# EAGLE board blinky board (EAGLE 9.5.2)
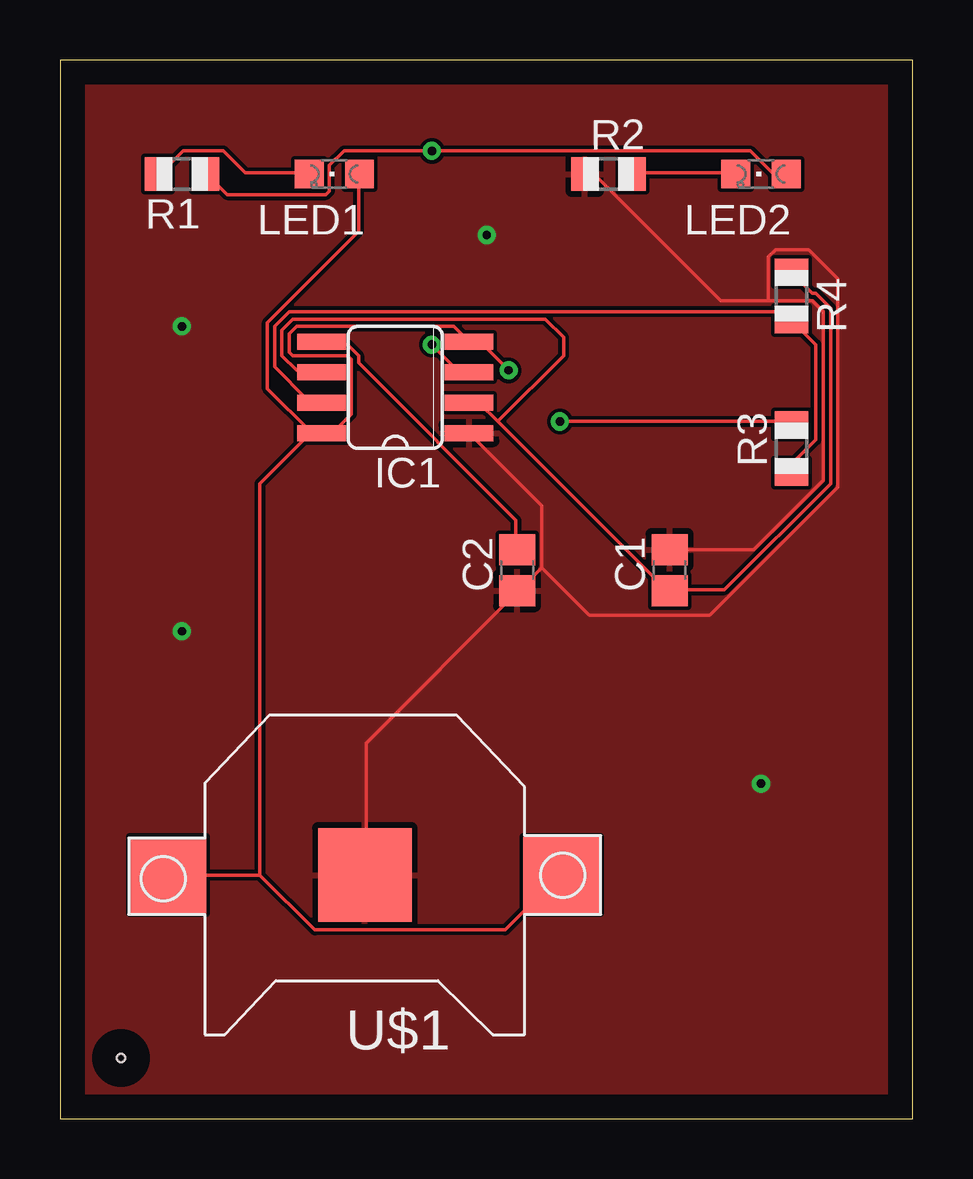
[diagram p0: board, top side]
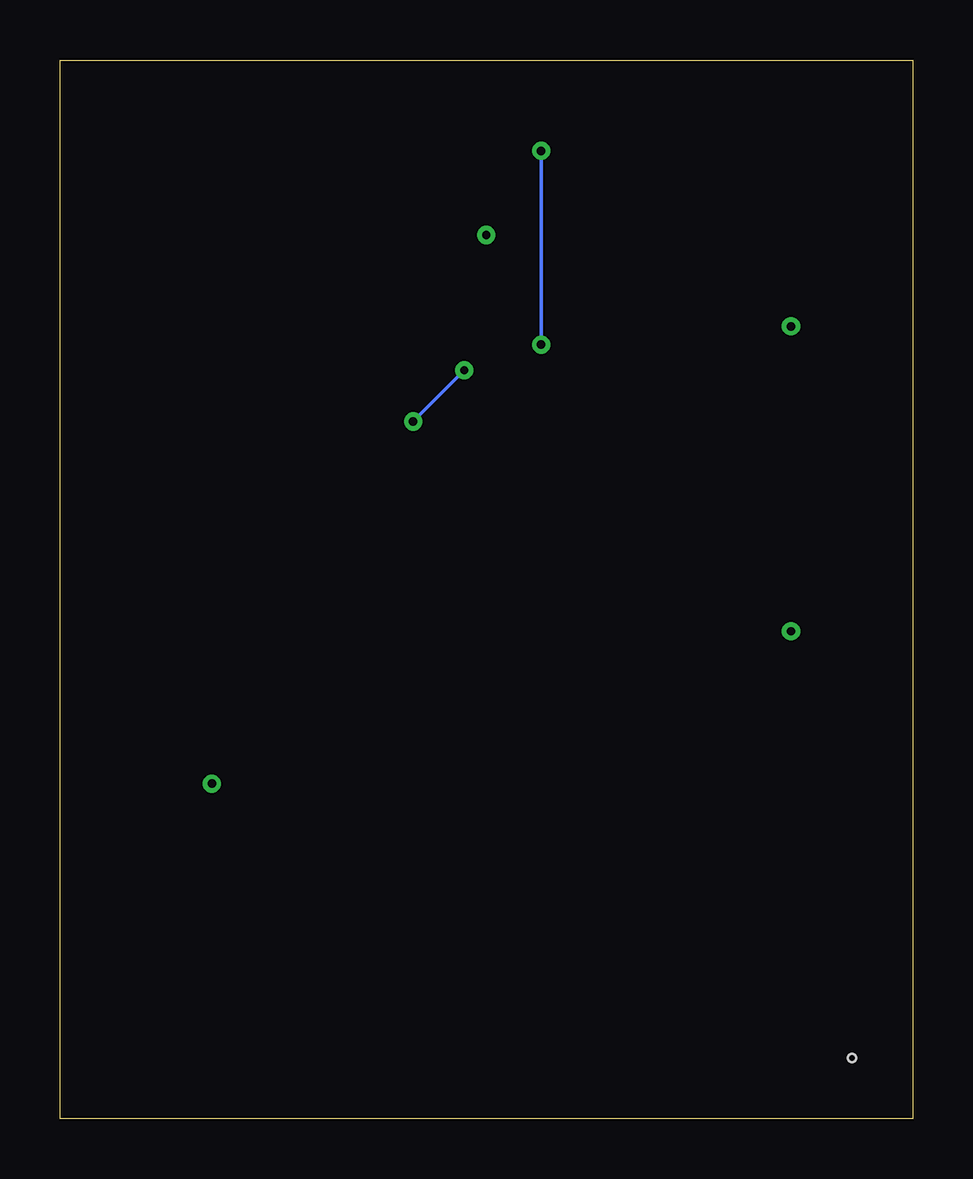
[diagram p1: board, bottom side, seen from below]

Size 35.54 x 44.12 mm. Coordinates in mm from the lower left corner, seen from the top.
Outline: 0,0 35.54,0 35.54,44.12 0,44.12 0,0
Copper layers (1*16): Top 0.035mm / dielectric 1.5mm / Bottom 0.035mm
Design rules "default": minimum track width 6mil, minimum drill 0.35mm, track to track 6mil, track to pad 6mil, pad to pad 6mil, via to via 6mil, smd to smd 6mil, copper to edge 40mil, drill to drill 6mil, minimum pad ring 10mil, minimum via ring 8mil, stop-mask expansion 4mil, vias tented up to drill 0mil, thermal gap 10mil
Holes 0.35 mm at 2.54,2.54

## Footprints (pad centres in the part's own frame; a part is rotated, then mirrored left to right if it is on the bottom)
C0805 = smd 1.3 x 1.5: 1 -0.85,0; 2 0.85,0
SO08 = smd 0.66 x 2.032: 1 -1.905,-3.073; 2 -0.635,-3.073; 3 0.635,-3.073; 4 1.905,-3.073; 5 1.905,3.073; 6 0.635,3.073; 7 -0.635,3.073; 8 -1.905,3.073
CHIPLED_0805 = smd 1.2 x 1.2: A 0,-1.05; C 0,1.05
R0805 = smd 1.1 x 1.4: 1 -1,0; 2 1,0
CR1220-SMD = smd 3.2 x 3.2: +$1 -8.2,0; +$2 8.2,0 | smd 3.9 x 3.9: - 0,0

## Placement (x,y rotation side)
C1  22UF  [C0805]  25.4,22.86 90 top
C2  0.01UF  [C0805]  19.05,22.86 90 top
IC1  LM555D  [SO08]  13.97,30.48 90 top
LED1  GREEN  [CHIPLED_0805]  11.43,39.37 90 top
LED2  GREEN  [CHIPLED_0805]  29.21,39.37 90 top
R1  100  [R0805]  5.08,39.37 180 top
R2  100  [R0805]  22.86,39.37 0 top
R3  1k  [R0805]  30.48,27.94 90 top
R4  100k  [R0805]  30.48,34.29 270 top
U$1  CR1220  [CR1220-SMD]  12.7,10.16 180 top

## Library data of the parts
C1 C2 IC1 LED1 LED2 R1-R4 U$1 = adafruit

## Nets
CONN: C1.1 IC1.2 IC1.6 R4.1
GND: C1.2 C2.1 IC1.1 R2.1 U$1.-
N$1: LED1.C R1.2
N$2: IC1.3 LED2.A R1.1
N$3: LED2.C R2.2
N$5: IC1.7 R3.1 R4.2
N$9: C2.2 IC1.5
VCC: IC1.4 IC1.8 LED1.A R3.2 U$1.+$1 U$1.+$2

## Tracks (layer width: path | path; a pad name or v marks a point on that pad's centre or on a via)
CONN
  Top 0.152: R4.1 30.58,35.15 31.34,34.39 31.5,34.39 32.11,33.78 32.11,26.47 27.69,22.05 25.4,22.05 C1.1 25.4,21.89 18.24,29.06 | 18.24,29.06 17.48,29.82 17.17,29.82 IC1.2 | 18.24,29.06 20.98,31.8 20.98,32.56 20.22,33.32 9.7,33.32 9.25,32.87 9.25,31.8 9.86,31.19 10.77,31.19 IC1.6
GND  (via drill 0.35)
  Top 0.152: 29.52,34.09 31.34,34.09 31.8,33.63 31.8,26.62 28.91,23.72 25.4,23.72 C1.2 | 29.52,34.09 27.53,34.09 22.35,39.27 21.9,39.27 R2.1 | 20.07,22.96 19.15,22.05 C2.1 19,21.89 12.75,15.65 12.75,10.16 U$1.- | 20.07,22.96 20.07,25.55 IC1.1 | 29.52,34.09 29.52,35.92 29.82,36.22 31.19,36.22 32.41,35 32.41,26.31 27.08,20.98 22.05,20.98 20.07,22.96
  other vias: 29.21,13.97 5.08,20.32 5.08,33.02 17.78,36.83
  pour Top: -1.27,45.72 -1.27,-1.27 36.83,-1.27 36.83,45.72
N$1
  Top 0.152: LED1.C 10.31,39.42 7.72,39.42 6.81,40.33 5.13,40.33 4.22,39.42 R1.2
N$2  (via drill 0.35)
  Top 0.152: LED2.A 30.12,39.42 29.67,39.42 28.75,40.33 v15.49,40.33 11.84,40.33 11.23,39.73 11.23,38.66 11.07,38.51 6.96,38.51 6.2,39.27 R1.1 | v15.49,32.26 16.56,31.19 17.02,31.19 IC1.3
  Bottom 0.152: v15.49,40.33 v15.49,32.26
N$3
  Top 0.152: LED2.C 28.14,39.42 23.88,39.42 R2.2
N$5
  Top 0.152: R3.1 30.58,27.08 30.58,27.38 31.5,28.3 31.5,32.26 30.58,33.17 R4.2 30.43,33.32 30.12,33.63 9.55,33.63 8.94,33.02 8.94,31.34 10.31,29.97 10.77,29.97 IC1.7
N$9
  Top 0.152: C2.2 19,23.72 19,24.94 12.45,31.5 12.45,31.8 11.99,32.26 10.92,32.26 IC1.5
VCC  (via drill 0.35)
  Top 0.152: 8.33,10.16 U$1.+$2 | 8.33,10.16 10.62,7.87 18.54,7.87 20.83,10.16 U$1.+$1 | 10.46,28.6 8.64,30.43 8.64,33.17 12.45,36.98 12.45,39.27 LED1.A | 10.46,28.6 10.77,28.6 IC1.8 | v20.83,29.06 30.43,29.06 R3.2 | v18.69,31.19 17.63,32.26 17.17,32.26 IC1.4 16.41,33.02 9.86,33.02 9.55,32.71 9.55,31.95 9.7,31.8 11.99,31.8 12.14,31.65 12.14,29.36 11.38,28.6 10.92,28.6 IC1.8 | 8.33,10.16 8.33,26.47 10.46,28.6 | 10.46,28.6 IC1.8
  Bottom 0.152: v18.69,31.19 v20.83,29.06